# Altium PCB PCB1.pcbdoc
Units mil, origin at the board's own origin, x right, y up, seen from the top; angles counter-clockwise.
Board outline 3645 x 4430 mil, 2 copper layers (Top Layer, Bottom Layer); 43 components, 32 nets, 250 pads, 0 vias.
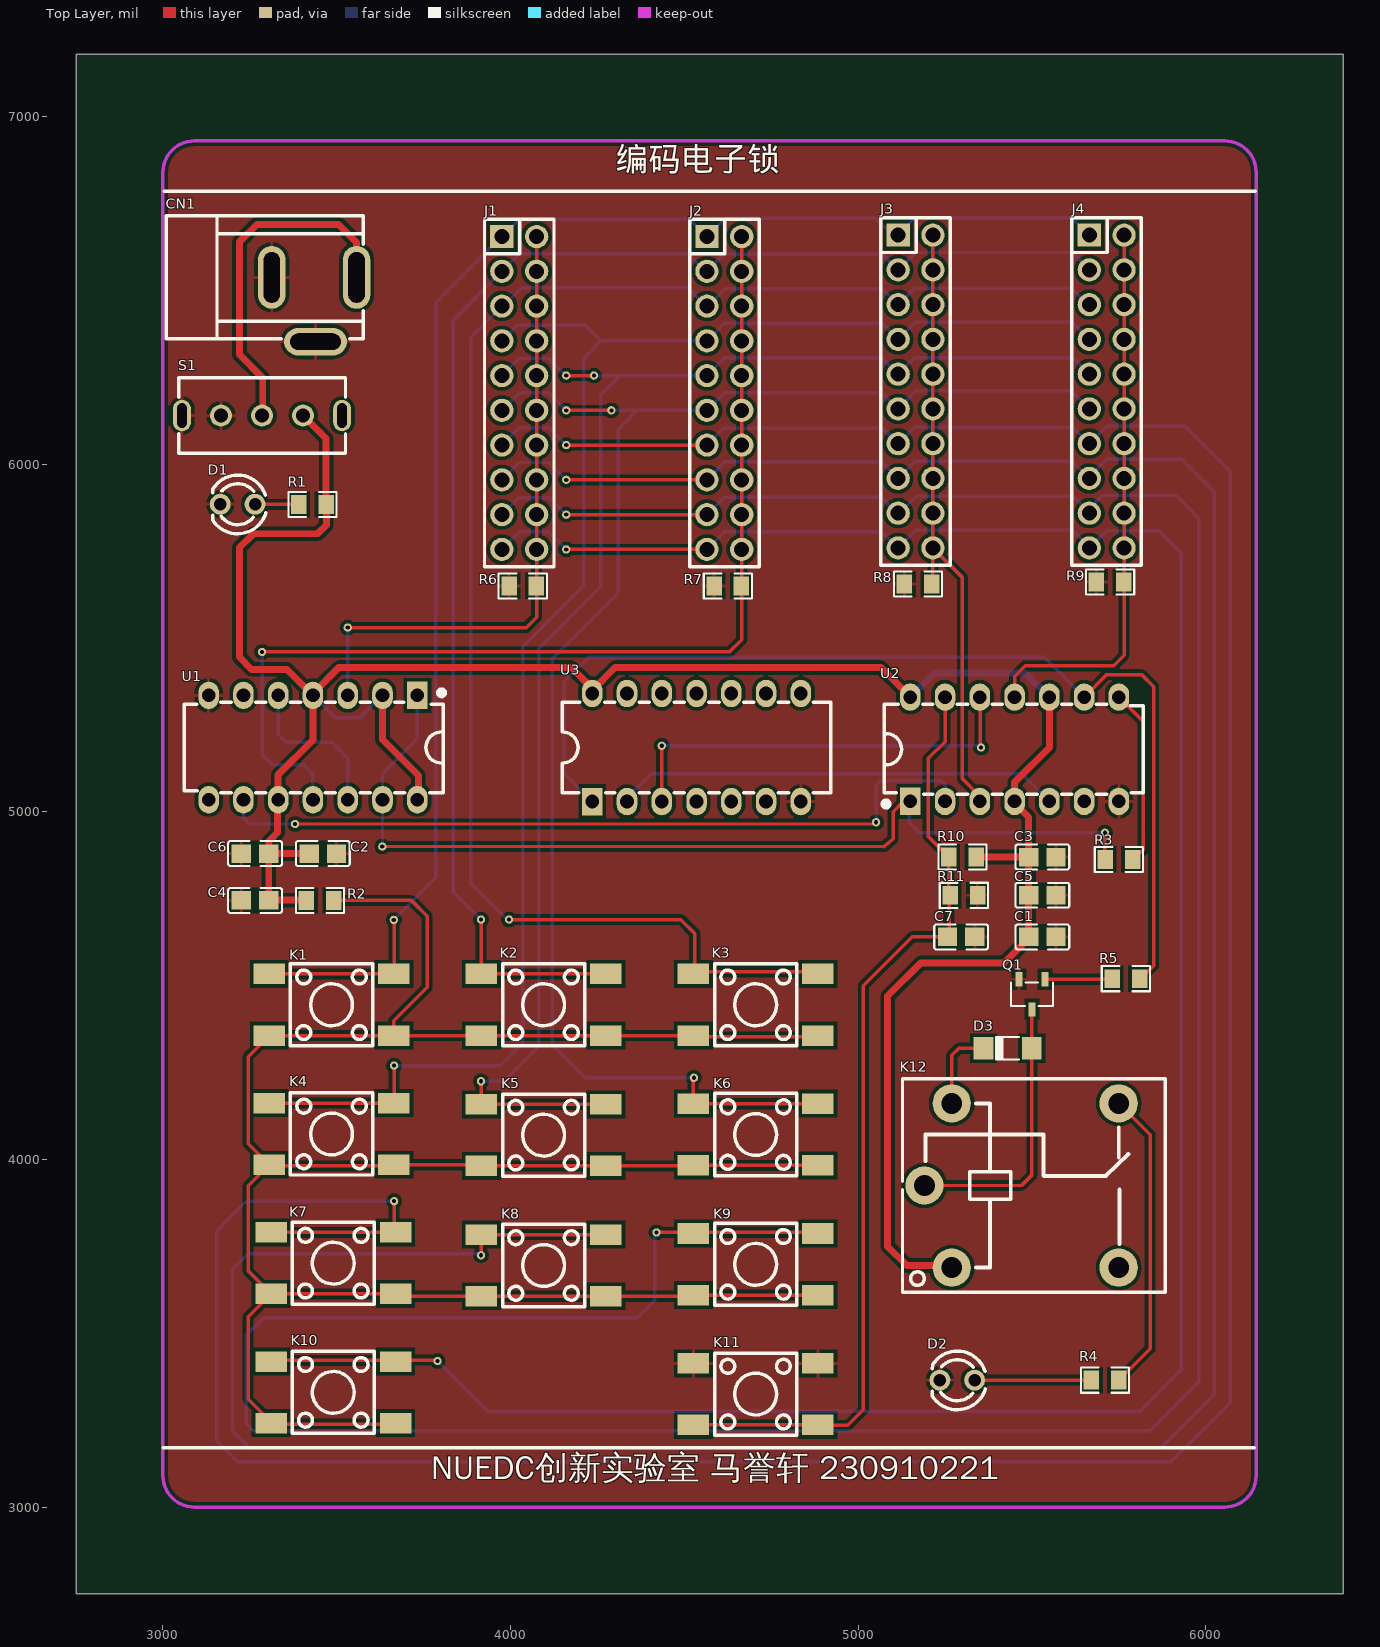
[diagram p0: Top Layer view]
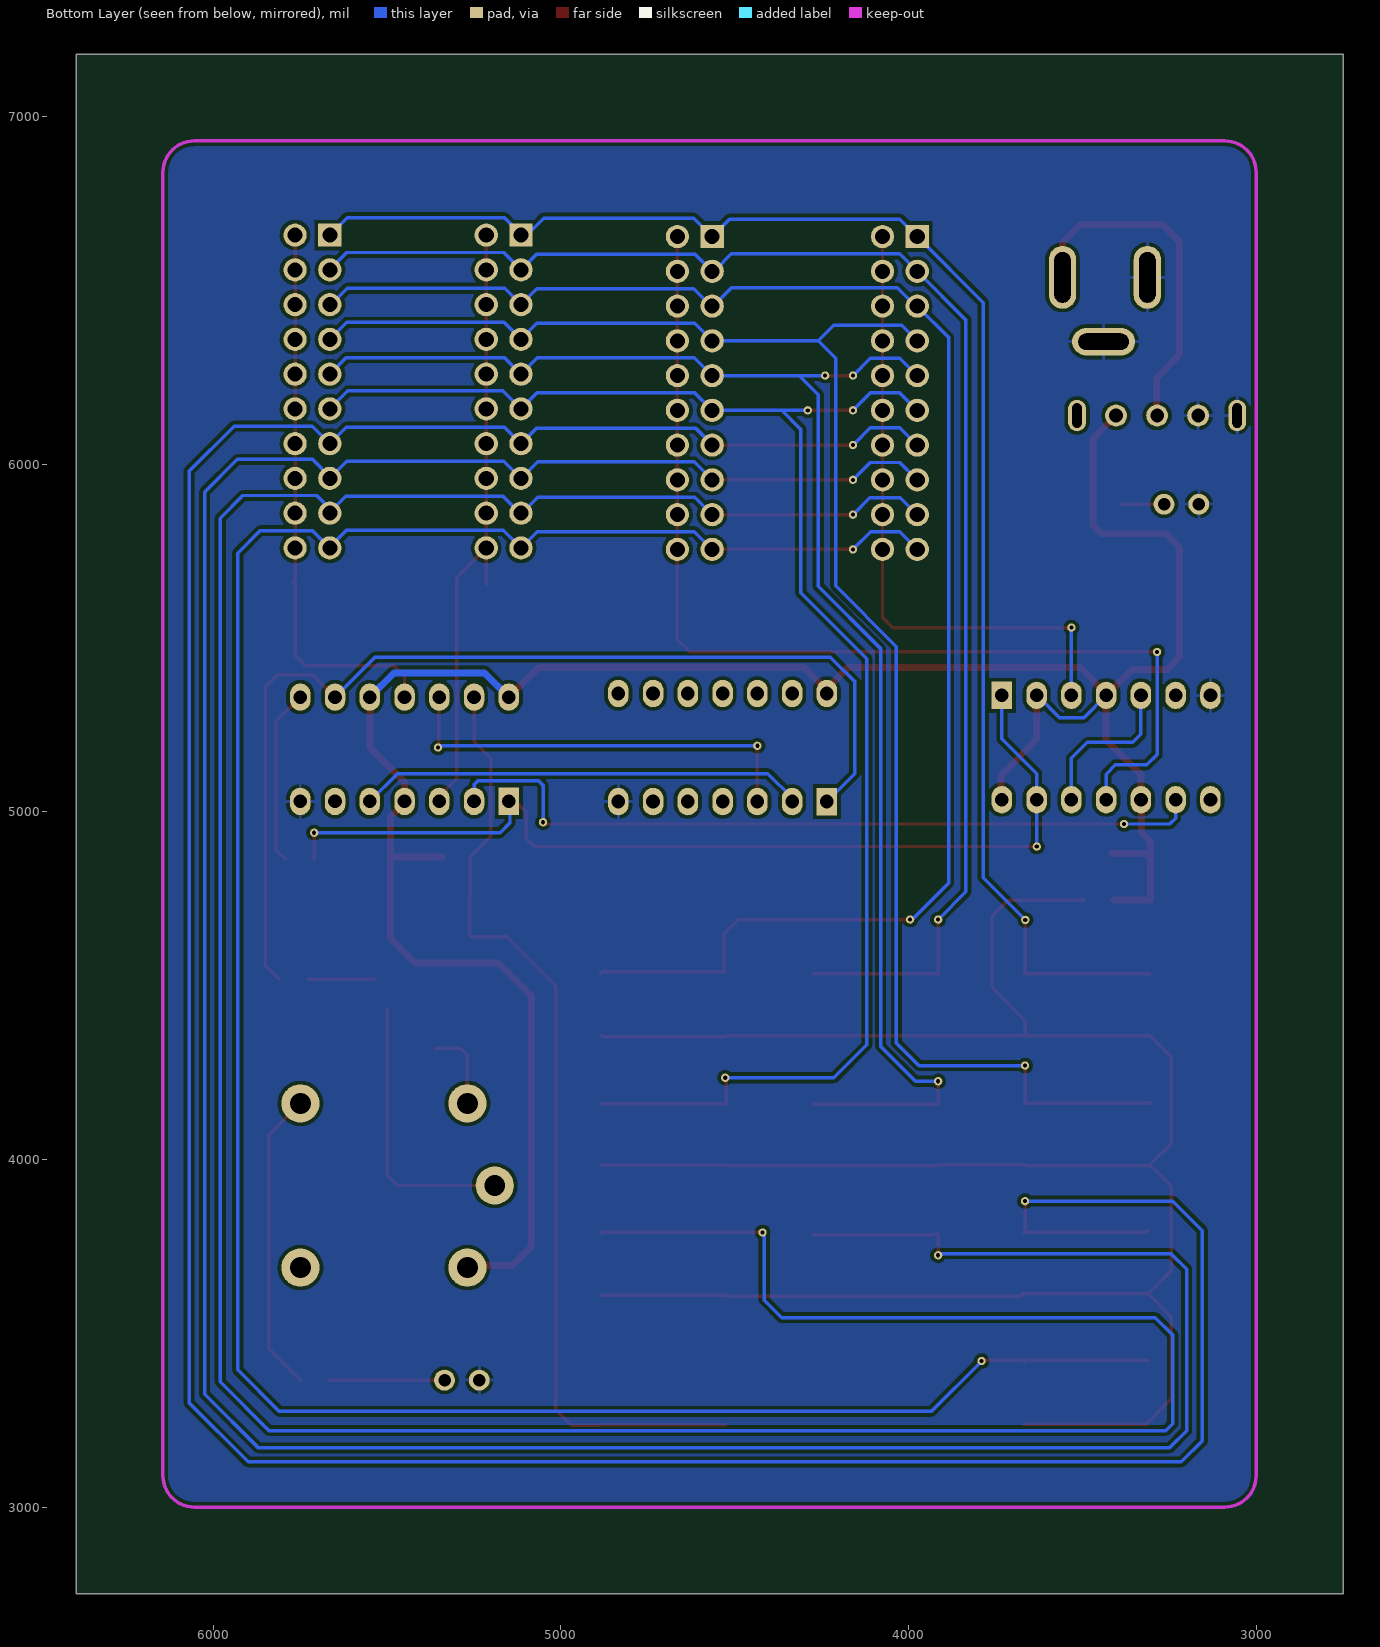
[diagram p1: Bottom Layer view, seen from below]

## Layer stack, top to bottom
Top Solder Mask Layer: solder mask 0.4, Solder Resist, Dk 3.5
Top Layer: signal copper 1.4
Dielectric1: dielectric 12.6, FR-4, Dk 4.8
Bottom Layer: signal copper 1.4
Bottom Solder Mask Layer: solder mask 0.4, Solder Resist, Dk 3.5

## Board outline
6395,2750 2750,2750 2750,7180 6395,7180

## Design rules (kind name [scope] priority, off if disabled: settings)
Clearance [All] p1: gap=10 ignorepadtopadclearanceinfootprint=FALSE
PolygonConnect [All] p1: connectstyle=Relief reliefconductorwidth=10 reliefentries=4 polygonreliefangle="90 Angle" airgapwidth=10
RoutingVias [All] p1: holewidth=28 width=50 viastyle="Through Hole" minholewidth=28 minwidth=50 maxholewidth=28 maxwidth=50
SolderMaskExpansion [All] p1: expansion=4 istentingtop=FALSE
Width [All] p1: maxlimit=10 minlimit=10 preferedwidth=10
30 further rules are at their usual default settings.

## Components (designator, comment, footprint, x,y, rotation, side; value= is the part's Value field where it differs from the comment)
C1 "CAP_0805" C0805 5530,4640 r180 top
C2 "CAP_0805" C0805 3460,4880 r180 top
C3 "CAP_0805" C0805 5530,4870 r180 top
C4 "CAP_0805" C0805 3265,4745 r0 top
C5 "CAP_0805" C0805 5530,4760 r180 top
C6 "CAP_0805" C0805 3265,4880 r0 top
C7 "CAP_0805" C0805 5296.09,4640 r0 top
CN1 "DC005" DC-IN-TH_DC005 3435,6445 r0 top
D1 "LED_TH-R_3mm" LED_TH-3mm 3215,5885 r180 top
D2 "LED_TH-R_3mm" LED_TH-3mm 5285,3365 r180 top
D3 "LL4148-GS08" SOD-80_L3.5-W1.5-RD 5430,4320 r0 top
J1 "2.54-2*10" HDR-TH_20P-P2.54-V-M-R2-C10-S2.54 4025,6205 r270 top
J2 "2.54-2*10" HDR-TH_20P-P2.54-V-M-R2-C10-S2.54 4615,6205 r270 top
J3 "2.54-2*10" HDR-TH_20P-P2.54-V-M-R2-C10-S2.54 5165,6209.11 r270 top
J4 "2.54-2*10" HDR-TH_20P-P2.54-V-M-R2-C10-S2.54 5715,6209.11 r270 top
K1 "TS-1002S-04526C" SW-SMD_4P-L6.0-W6.0-P4.50-LS9.0-2 3485,4445 r0 top
K2 "TS-1002S-04526C" SW-SMD_4P-L6.0-W6.0-P4.50-LS9.0-2 4095,4445 r0 top
K3 "TS-1002S-04526C" SW-SMD_4P-L6.0-W6.0-P4.50-LS9.0-2 4705,4445 r0 top
K4 "TS-1002S-04526C" SW-SMD_4P-L6.0-W6.0-P4.50-LS9.0-2 3485,4073.33 r0 top
K5 "TS-1002S-04526C" SW-SMD_4P-L6.0-W6.0-P4.50-LS9.0-2 4095,4070 r0 top
K6 "TS-1002S-04526C" SW-SMD_4P-L6.0-W6.0-P4.50-LS9.0-2 4705,4071.67 r0 top
K7 "TS-1002S-04526C" SW-SMD_4P-L6.0-W6.0-P4.50-LS9.0-2 3490,3701.67 r0 top
K8 "TS-1002S-04526C" SW-SMD_4P-L6.0-W6.0-P4.50-LS9.0-2 4095,3695 r0 top
K9 "TS-1002S-04526C" SW-SMD_4P-L6.0-W6.0-P4.50-LS9.0-2 4705,3698.33 r0 top
K10 "TS-1002S-04526C" SW-SMD_4P-L6.0-W6.0-P4.50-LS9.0-2 3490,3330 r0 top
K11 "TS-1002S-04526C" SW-SMD_4P-L6.0-W6.0-P4.50-LS9.0-2 4705,3325 r0 top
K12 "SRD-05VDC-SL-C" RELAY-TH_SRD-XXVDC-XL-C 5470,3925 r0 top
Q1 "S8050-J3Y" SOT-23-3_L3.0-W1.7-P0.95-LS2.9-BR 5500,4475 r90 top
R1 "Res_0805" R0805 3430,5884.41 r180 top
R2 "Res_0805" R0805 3452.03,4745 r0 top
R3 "Res_0805" R0805 5750,4863.21 r180 top
R4 "Res_0805" R0805 5710,3365 r0 top
R5 "Res_0805" R0805 5770,4520 r180 top
R6 "Res_0805" R0805 4035,5650 r0 top
R7 "Res_0805" R0805 4625,5650 r0 top
R8 "Res_0805" R0805 5172.36,5655 r0 top
R9 "Res_0805" R0805 5725,5660.89 r0 top
R10 "Res_0805" R0805 5300,4870 r0 top
R11 "Res_0805" R0805 5304.06,4760 r0 top
S1 "SS12F44G5" SW-TH_SHOU-HAN_SS12F44G4 3285,6140 r0 top
U1 "SN74LS74N" DIP-14_L19.1-W6.4-P2.54-LS7.6-BL 3431.59,5185 r180 top
U2 "SN74LS74N" DIP-14_L19.1-W6.4-P2.54-LS7.6-BL 5450,5180 r0 top
U3 "SN74LS32N" PDIP-14_L19.6-W6.5-P2.54-LS7.9-BL 4535,5185 r0 top

## Footprints (in the part's own frame and the unit in brackets; to place one, negate y for a bottom-side part, rotate by r counter-clockwise, add the part's x,y. Pads: shape width x height; smd on the part's side, far side on the other; paste and mask are expansions set on the pad)
C0805 [mm]
  rect 1.41x1.35 smd paste-100 mask+0.051: 1(-1,0) 2(1,0)
  silkscreen extent -1.96,-0.9 1.96,0.9
DC-IN-TH_DC005 [mm]
  oval 2x4.6 hole 1.2 slot 3.7 at 90 deg mask+0.051: 1(3.1,2.35) 2(-3.1,2.35)
  oval 4.6x2 hole 1.2 slot 3.7 at 0 deg mask+0.051: 3(0.1,-2.35)
  silkscreen extent -10.8,-2.15 3.6,6.85
DIP-14_L19.1-W6.4-P2.54-LS7.6-BL [mm]
  rect 1.5x2 hole 1 mask+0.051: 1(-7.62,-3.81)
  oval 1.5x2 hole 1 mask+0.051: 2(-5.08,-3.81) 3(-2.54,-3.81) 4(0,-3.81) 5(2.54,-3.81) 6(5.08,-3.81) 7(7.62,-3.81) 8(7.62,3.81) 9(5.08,3.81) 10(2.54,3.81) 11(0,3.81) 12(-2.54,3.81) 13(-5.08,3.81) 14(-7.62,3.81)
  silkscreen extent -9.59,-4.2 9.4,3.3
HDR-TH_20P-P2.54-V-M-R2-C10-S2.54 [mm]
  rect 1.7x1.7 hole 1.1 mask+0.051: 1(-11.43,-1.27)
  round 1.7 hole 1.1 mask+0.051: 2(-11.43,1.27) 3(-8.89,-1.27) 4(-8.89,1.27) 5(-6.35,-1.27) 6(-6.35,1.27) 7(-3.81,-1.27) 8(-3.81,1.27) 9(-1.27,-1.27) 10(-1.27,1.27) 11(1.27,-1.27) 12(1.27,1.27) 13(3.81,-1.27) 14(3.81,1.27) 15(6.35,-1.27) 16(6.35,1.27) 17(8.89,-1.27) 18(8.89,1.27) 19(11.43,-1.27) 20(11.43,1.27)
  silkscreen extent -12.7,-2.54 12.7,2.54
LED_TH-3mm [mil]
  round 60 hole 36 paste-99999 mask+2: 1(-50,0) 2(50,0)
  silkscreen extent -81,-84 72,85
PDIP-14_L19.6-W6.5-P2.54-LS7.9-BL [mm]
  rect 1.5x2 hole 1 mask+0.051: 1(-7.62,-3.95)
  oval 1.5x2 hole 1 mask+0.051: 2(-5.08,-3.95) 3(-2.54,-3.95) 4(0,-3.95) 5(2.54,-3.95) 6(5.08,-3.95) 7(7.62,-3.95) 8(7.62,3.95) 9(5.08,3.95) 10(2.54,3.95) 11(0,3.95) 12(-2.54,3.95) 13(-5.08,3.95) 14(-7.62,3.95)
  silkscreen extent -9.8,-3.3 9.8,3.3
R0805 [mm]
  rect 1.133x1.377 smd paste-100 mask+0.051: 1(-1,0) 2(1,0)
  silkscreen extent -1.76,-0.92 1.76,0.92
RELAY-TH_SRD-XXVDC-XL-C [mil]
  round 110 hole 60 mask+2: 1(-200.79,-236.22) 2(279.52,-236.2) 3(279.53,236.2) 4(-200.79,236.22) 5(-279.53,0)
  silkscreen extent -342,-307 413,307
SOD-80_L3.5-W1.5-RD [mm]
  rect 1.44x1.62 smd mask+0.051: 1(-1.765,0) 2(1.765,0)
  silkscreen extent -0.84,-0.83 0.84,0.83
SOT-23-3_L3.0-W1.7-P0.95-LS2.9-BR [mil]
  rect 40.85x20.95 smd mask+2: 1(43.36,-37.4) 2(43.36,37.4) 3(-43.36,0)
  silkscreen extent -34,-60 34,60
SW-SMD_4P-L6.0-W6.0-P4.50-LS9.0-2 [mm]
  rect 2.3x1.5 smd mask+0.051: 1(-4.55,2.25) 2(4.55,2.25) 3(-4.55,-2.25) 4(4.55,-2.25)
  silkscreen extent -3,-3 3,3
SW-TH_SHOU-HAN_SS12F44G4 [mm]
  round 1.6 hole 1 paste-2539.97 mask+0.05: 1(-3,0) 2(0,0) 3(3,0)
  oval 1.3x2.3 hole 0.7 slot 1.8 at 90 deg paste-2539.97 mask+0.05: 4(5.85,0) 5(-5.85,0)
  silkscreen extent -6.1,-2.75 6.1,2.75

## Free pads (board coordinates)
  round 24 hole 12 mask+2: 21(3665,3880) 22(3380,4965) 23(5051.54,4970) 24(3285,5460) 25(3531.59,5530) 26(4435,5190) 27(5353.47,5185) 28(3631.12,4900) 29(3664.13,4689.13) 30(3915,4690) 31(3995.63,4690) 32(3915,4225) 33(3665,4270) 34(4527.46,4235) 35(4160,6055) 36(4160,5955) 37(4160,5855) 38(4160,5755) 39(4160,6255) 40(4160,6155) 41(4240,6255) 42(4290,6155) 43(3915,3724.26) 44(4420,3790) 45(3790,3420) 46(5710,4940)

## Nets (pads, with @x,y where several pads share a name; then routed paths per layer and width w, separated by ;. In a path a pad name is that pad's centre, name@x,y a point inside that pad or via, vN(x,y) a via of type N, cw(c..) or ccw(c..) an arc to the next point about the centre after c; other vN are vias at no path point)
1B: U2.5 U3.2 | length 1287.8
  Bottom Layer w10: U3.2 4335,5040 4405,5110 5470.12,5110 U2.5@5550.12,5030
1CK1: J1.2 J1.4 J1.6 J1.8 J1.10 J1.12 J1.14 J1.16 J1.18 J1.20 pad.25 R6.2 U1.3 | length 1840
  Top Layer w10: pad.25@3534.67,5530 4045,5530 4075,5560 4075,5650 J1.2@4075,6652.25
  Bottom Layer w10: U1.3 pad.25
1CK2: J3.2 J3.4 J3.6 J3.8 J3.10 J3.12 J3.14 J3.16 J3.18 J3.20 R8.2 U2.3 | length 1790.5
  Top Layer w10: R8.2 5215,5658.27 J3.2 ; J3.20 5300,5674.11 5300,5095 5350.12,5044.88 U2.3@5350.12,5030
2CK1: J2.2 J2.4 J2.6 J2.8 J2.10 J2.12 J2.14 J2.16 J2.18 J2.20 pad.24 R7.2 U1.11 | length 3092.9
  Top Layer w10: pad.24 4630,5460 4665,5495 4665,5650 J2.2
  Bottom Layer w10: pad.24 3285,5165 3315,5135 3405,5135 3431.59,5108.41 U1.11
2CK2: J4.2 J4.4 J4.6 J4.8 J4.10 J4.12 J4.14 J4.16 J4.18 J4.20 R9.2 U2.11 | length 1611.6
  Top Layer w10: U2.11@5450.12,5330 5450.12,5390 5480.12,5420 5735,5420 5765,5450 R9.2@5765,5660.89 ; J4.2 5765,5667.62 R9.2@5771.73,5660.89
2CLR: C7.1 K11.3 K11.4 R10.1 R11.1 U2.13 | length 2763.1
  Top Layer w10: K11.3 K11.4 4885.55,3235 4970,3235 5015,3280 5015,4500 5155.79,4640.79 C7.1@5254.85,4640.79 ; U2.13 5250,5202.18 5201.68,5153.86 5201.68,4928.95 R10.1 R11.1@5260.63,4760 ; C7.1 5261.83,4645.12 R11.1@5261.83,4760
2D: U1.5 U1.12 | length 459.4
  Bottom Layer w10: U1.5 3331.59,5222.92 3354.89,5199.63 3485.66,5199.63 3531.59,5153.69 U1.12
3D: pad.22 pad.23 U1.9 U2.2 | length 2245.5
  Top Layer w10: pad.22 5046.54,4965 pad.23
  Bottom Layer w10: U1.9 3231.59,4981.98 3248.57,4965 pad.22 ; pad.23 5051.54,5076.27 5065.26,5090 5238.06,5090 5250.12,5077.95 U2.2@5250.12,5030
4D: pad.26 pad.27 U2.12 U3.3 | length 1223.9
  Top Layer w10: U3.3 pad.26 ; U2.12@5350.12,5330 5350.97,5329.15 pad.27@5350.97,5187.5
  Bottom Layer w10: pad.26 5348.47,5190 pad.27
$1N2580: D1.1 R1.2 | length 122.9
  Top Layer w10: D1.1 3265.59,5884.41 R1.2@3387.68,5884.41
$1N2943: R3.1 U2.8 | length 507.3
  Top Layer w10: U2.8@5750.12,5330 5820.12,5260 5820.12,4891.1 R3.1@5792.22,4863.21
$1N4176: K1.3 K1.4 K2.3 K2.4 K3.3 K3.4 K4.3 K4.4 K5.3 K5.4 K6.3 K6.4 K7.3 K7.4 K8.3 K8.4 K9.3 K9.4 K10.3 K10.4 R2.2 | length 7035.3
  Top Layer w10: K4.3@3305.87,3981.33 3660.71,3981.33 K4.4 K5.3@3915.87,3984.75 ; K10.3@3310,3245 3316.18,3238.82 K10.4@3669.13,3238.82 ; K10.3@3313.09,3241.91 3245,3310 3245,3547.21 K7.3 ; R2.2@3494.35,4745 3715,4745 3760,4700 3760,4495 3664.13,4399.13 K1.4 ; K7.4@3669.13,3608.81 3664.86,3613.08 K7.3 ; K7.4@3669.13,3617.07 3679.79,3606.41 K8.3 K8.4 4521.41,3606.41 K9.3@4525,3610 ; K2.3 K1.4 ; K5.3@3918.91,3981.41 K5.4 ; K2.3@3918.91,4356.41 K2.4 4522.03,4356.41 4525.87,4352.58 4880.29,4352.58 K3.4 ; K5.4@4277.7,3981.41 4524.2,3981.41 K6.3 K6.4 ; K9.3@4525,3609.75 K9.4 ; K7.3 3245,3678.95 3245,3923.88 K4.3 3245,4045.62 3245,4295.55 K1.3 K1.4
$1N5266: Q1.1 R5.2 | length 191
  Top Layer w10: Q1.1 5726.04,4518.36 R5.2@5727.68,4520
$1N5277: D2.1 R4.1 | length 332.8
  Top Layer w10: D2.1 R4.1@5667.78,3365
$1N5285: K12.3 R4.2 | length 871.2
  Top Layer w10: R4.2 5840,3455.63 5840,4070.73 K12.3
$1N5293: D3.1 K12.4 | length 237.9
  Top Layer w10: K12.4 5269.21,4299.21 5290,4320 D3.1
$1N5296: D3.2 K12.5 Q1.3 | length 799.2
  Top Layer w10: K12.5 5469.8,3925 5500,3955.2 D3.2@5500,4320.51 ; D3.2 D3.2@5500,4320.51 ; Q1.3 D3.2@5500,4320.51
+5V: CN1.1 S1.2 | length 1008.4
  Top Layer w20: S1.2 3287.06,6142.07 3287.06,6248.27 3220,6315.33 3220,6640 3270,6690 3505,6690 3557.04,6637.96 CN1.1
CLR: pad.28 pad.46 R3.2 U1.1 U1.13 U2.1 | length 2807.3
  Top Layer w10: pad.28@3631.59,4900.47 5075.42,4900 5100.47,4922.81 5100.47,5000 5130.47,5030 U2.1 ; pad.46 5710,4863.84 R3.2
  Bottom Layer w10: pad.28 3631.59,4900.47 U1.13 3631.59,5110 3731.59,5210 U1.1 ; U2.1@5146.6,5030 5146.6,4968.4 5175,4940 pad.46
GND: C1.1 C2.1 C3.1 C4.1 C5.1 C6.1 C7.2 CN1.2 CN1.3 D1.2 D2.2 K11.1 K11.2 Q1.2 R6.1 R7.1 R8.1 R9.1 R11.2 S1.1 S1.5 U1.7 U2.7 U3.7
K0: J1.1 J2.1 J3.1 J4.1 K1.1 K1.2 pad.29 | length 4423.8
  Top Layer w10: K1.1 3668.08,4533.57 3665,4536.66 pad.29@3665,4685
  Bottom Layer w10: pad.29@3664.13,4688.98 pad.29 3785,4810 3785,6465 J1.1 4025,6705 4515,6705 J2.1 4618.11,6708.11 5050,6708.11 5099,6659.11 J3.1 ; J3.1@5115,6661.54 5162.57,6709.11 5615,6709.11 J4.1
K1: J1.3 J2.3 J3.3 J4.3 K2.1 K2.2 pad.30 | length 4282.3
  Top Layer w10: pad.30 3915,4534.45 K2.1 K2.2
  Bottom Layer w10: pad.30 3835,4770 3835,6415 J1.3 4025,6605 4510,6605 4555,6560 J2.3@4565,6560 ; J2.3 4614.71,6604.71 5069.39,6604.71 J3.3 5165,6609.11 5616.57,6609.11 5665,6560.68 J4.3
K2: J1.5 J2.5 J3.5 J4.5 K3.1 K3.2 pad.31 | length 4679.3
  Top Layer w10: pad.31 4490,4690 4530,4650 4530,4540 4881.03,4540 K3.2@4887.45,4533.57
  Bottom Layer w10: J1.5@3975,6450 4032.38,6507.38 4509.54,6507.38 J2.5@4565,6451.92 ; J1.5 3885,6365 3885,4795 pad.31@3990,4690 ; J2.5@4568.03,6455 4617.98,6504.96 5069.15,6504.96 J3.5 5162.11,6506.22 5615,6506.22 5662.11,6459.11 J4.5
K3: J1.7 J2.7 J3.7 J4.7 K4.1 K4.2 pad.33 | length 4783
  Top Layer w10: K4.1@3305,4165 3308.09,4161.91 K4.2 ; K4.2@3665,4165 pad.33
  Bottom Layer w10: pad.33 3970,4270 4035,4335 4035,5475 4210,5650 4210,6305 4260,6355 ; J1.7 4020,6400 4215,6400 4260,6355 ; J4.7 5616.1,6408 5163.9,6408 J3.7 5069.11,6405 4615,6405 J2.7 4260,6355
K4: J1.9 J2.9 J3.9 J4.9 K5.1 K5.2 pad.32 pad.39 pad.41 | length 4470.2
  Top Layer w10: K5.1@3915,4158.59 pad.32 ; K5.1 K5.2 ; pad.39 pad.41
  Bottom Layer w10: pad.32 3980,4225 4080.7,4325.7 4080.7,5470 4260,5649.3 4260,6200 4315,6255 ; J1.9 4025,6305 4110,6305 pad.39 ; pad.41 4315,6255 ; J4.9 5617.12,6306.98 5162.88,6306.98 J3.9 5067.96,6306.14 4616.14,6306.14 J2.9 4315,6255
K5: J1.11 J2.11 J3.11 J4.11 K6.1 K6.2 pad.34 pad.40 pad.42 | length 4618.4
  Top Layer w10: pad.40 pad.42 ; pad.34@4525,4235 4525,4161.12 4525.88,4160.24 K6.2
  Bottom Layer w10: J1.11 4025,6205 4110,6205 pad.40 ; pad.42 4365,6155 ; pad.34@4525,4235 4215,4235 4120,4330 4120,5440 4310,5630 4310,6100 4365,6155 ; J4.11 5613.09,6211.01 5166.91,6211.01 J3.11 5069.11,6205 4615,6205 J2.11 4365,6155
K6: J1.13 J2.13 J3.13 J4.13 K7.1 K7.2 pad.21 pad.35 | length 9586.3
  Top Layer w10: K7.1@3310,3795 3314.76,3790.24 K7.2 3665,3794.37 pad.21 ; pad.35 J2.13@4567.6,6055
  Bottom Layer w10: pad.21 3240,3880 3155,3795 3155,3190 3215,3130 5900,3130 6070,3300 6070,5980 5940.31,6109.69 5715.58,6109.69 J4.13 5617.46,6106.64 5162.54,6106.64 J3.13 5069.99,6104.12 4612.93,6104.12 J2.13@4563.82,6055 ; J1.13 4025,6105 4110,6105 pad.35
K7: J1.15 J2.15 J3.15 J4.15 K8.1 K8.2 pad.36 pad.43 | length 9352
  Top Layer w10: pad.43 3915,3782.72 K8.1 ; K8.1@3920,3790 3926.43,3783.57 K8.2 ; pad.36 J2.15
  Bottom Layer w10: pad.43@3915,3729.26 3245,3729.26 3200,3684.26 3200,3220 3250,3170 5870,3170 6025,3325 6025,5920 5931.2,6013.8 5714.7,6013.8 J4.15@5665,5964.11 ; J1.15 4024.95,6004.95 4110.05,6004.95 pad.36 ; J2.15 4616.89,6006.89 5067.22,6006.89 J3.15 5164.04,6008.15 5615.96,6008.15 J4.15
K8: J1.17 J2.17 J3.17 J4.17 K9.1 K9.2 pad.37 pad.44 | length 9603.9
  Top Layer w10: pad.37 J2.17 ; pad.44 K9.1@4525.87,3790 ; K9.1@4525.87,3790.65 4880.39,3790.65 K9.2
  Bottom Layer w10: J1.17 4023.37,5903.37 4111.63,5903.37 pad.37 ; pad.44@4415,3795 4415,3595 4365,3545 3290,3545 3240,3495 3240,3240 3260,3220 5840,3220 5980,3360 5980,5845 5915,5910 5702.56,5910 J4.17@5660,5867.44 ; J2.17 4614.6,5904.6 5067.02,5904.6 5115,5856.62 5166.77,5908.39 5619.05,5908.39 J4.17@5665,5862.44
K9: J1.19 J2.19 J3.19 J4.19 K10.1 K10.2 pad.38 pad.45 | length 7209.9
  Top Layer w10: K10.1@3310.87,3421.92 3665.78,3421.92 K10.2 ; K10.2@3667.46,3416.9 3673.36,3422.8 pad.45@3790,3422.8 ; pad.38 J2.19
  Bottom Layer w10: pad.45 3935,3275 5810,3275 5930,3395 5930,5744.22 5865,5809.22 5715.11,5809.22 J4.19 ; J1.19 4025.72,5805.72 4109.28,5805.72 pad.38 ; J2.19 4616.11,5806.11 5068,5806.11 J3.19 5165.79,5809.9 5617.03,5809.9 J4.19@5665,5761.93
VCC: C1.2 C2.2 C3.2 C4.2 C5.2 C6.2 K12.1 R1.1 R2.1 R10.2 S1.3 U1.2 U1.4 U1.10 U1.14 U2.4 U2.10 U2.14 U3.14 | length 7260
  Top Layer w20: C4.2 C6.2 ; C4.2@3304.37,4745.79 3409.21,4745.79 R2.1@3410,4745 ; U1.10@3329.37,5032.78 U1.10 ; S1.3 3469.37,6073.73 R1.1 ; C2.2@3416.69,4880 C6.2 ; U1.4@3431.59,5340.93 3505.66,5415 4175,5415 4235,5355 U3.14@4235,5343.46 ; R1.1@3470,5880 3470,5825 3445,5800 3260,5800 3220,5760 3220,5445 3255,5410 3356.59,5410 U1.4 3431.59,5206.69 3331.59,5106.69 U1.10 ; U1.2 3631.59,5208.11 3734.7,5105 U1.14@3734.7,5035 ; U3.14@4235,5349.23 4300.77,5415 5065.12,5415 U2.14@5150.12,5330 ; K12.1 5262.99,3695 5140,3695 5085,3750 5085,4470 5180,4565 5419.41,4565 5490.63,4636.22 C3.2 ; R10.2@5342.32,4870 C3.2 ; U2.10@5550.12,5330 5550,5329.88 5550,5185 5450.12,5085.12 5450.12,5030 5447.85,5027.73 5490.63,4984.95 C3.2 ; C6.2 3304.37,4914.37 3330,4940 3330,5033.41 U1.10
  Bottom Layer w10: U1.4 3496.59,5270 3565,5270 3630,5335 U1.2
  Bottom Layer w20: U2.14@5150.12,5330 5220.12,5400 5479.88,5400 U2.10@5550,5329.88
VO: R5.1 U2.9 U3.1 | length 3047.3
  Top Layer w10: U2.9@5650.12,5330 5715.12,5395 5815,5395 5850,5360 5850,4557.78 R5.1@5812.22,4520
  Bottom Layer w10: U3.1 4155,5109.49 4155,5375 4225,5445 5535.12,5445 U2.9@5650.12,5330
pads on no net: K12.2 S1.4 U1.6 U1.8 U2.6 U3.4 U3.5 U3.6 U3.8 U3.9 U3.10 U3.11 U3.12 U3.13

## Polygon pours and split planes (outlines as drawn)
GND on Bottom Layer "Bottom Layer-GND" (solid, remove dead copper, pour order 0): 3000,3000 6145,3000 6145,6930 3000,6930
GND on Top Layer "Top Layer-GND" (solid, remove dead copper, pour order 1): 3000,3000 6145,3000 6145,6930 3000,6930

## Keep-outs
Board Outline Layer:
  lines w10: 3000,6839.9 cw(c3089.95,6840.04) 3000,6840 ; 6052.5,3000 3090,3000 cw(c3090,3090) 3000,3090 3000,6840 ; 6055,3000 ccw(c6055,3090) 6145,3090.1 6145,6840 ; 6145,6842.5 6145,6840 ; 3000,6840 cw(c3090,6840) 3090,6930 6054.9,6930 cw(c6055,6840) 6145,6840

## Silkscreen, mask and mechanical layers (free items; w line width, h text height)
Top Silkscreen Layer:
  lines w10: 3000.59,3170 6139.41,3170 ; 3003.64,6785.11 6142.46,6785.11
  text "编码电子锁" at 4300.73,6821.94 h118.95
  text "NUEDC创新实验室 马誉轩 230910221" at 3771.36,3056.95 h118.95